# EAGLE board uradmonitor_D.101 (EAGLE 6.1)
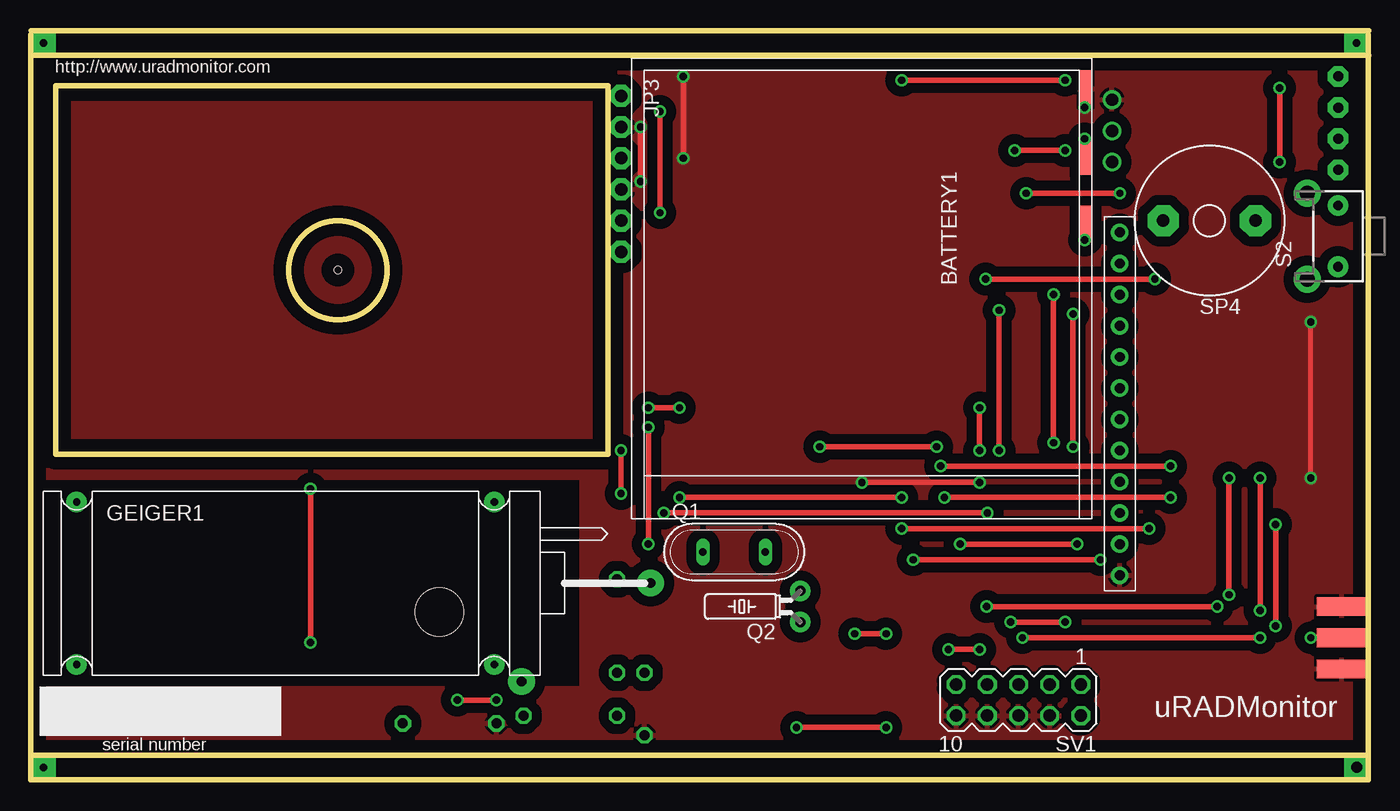
[diagram p0: board, top side]
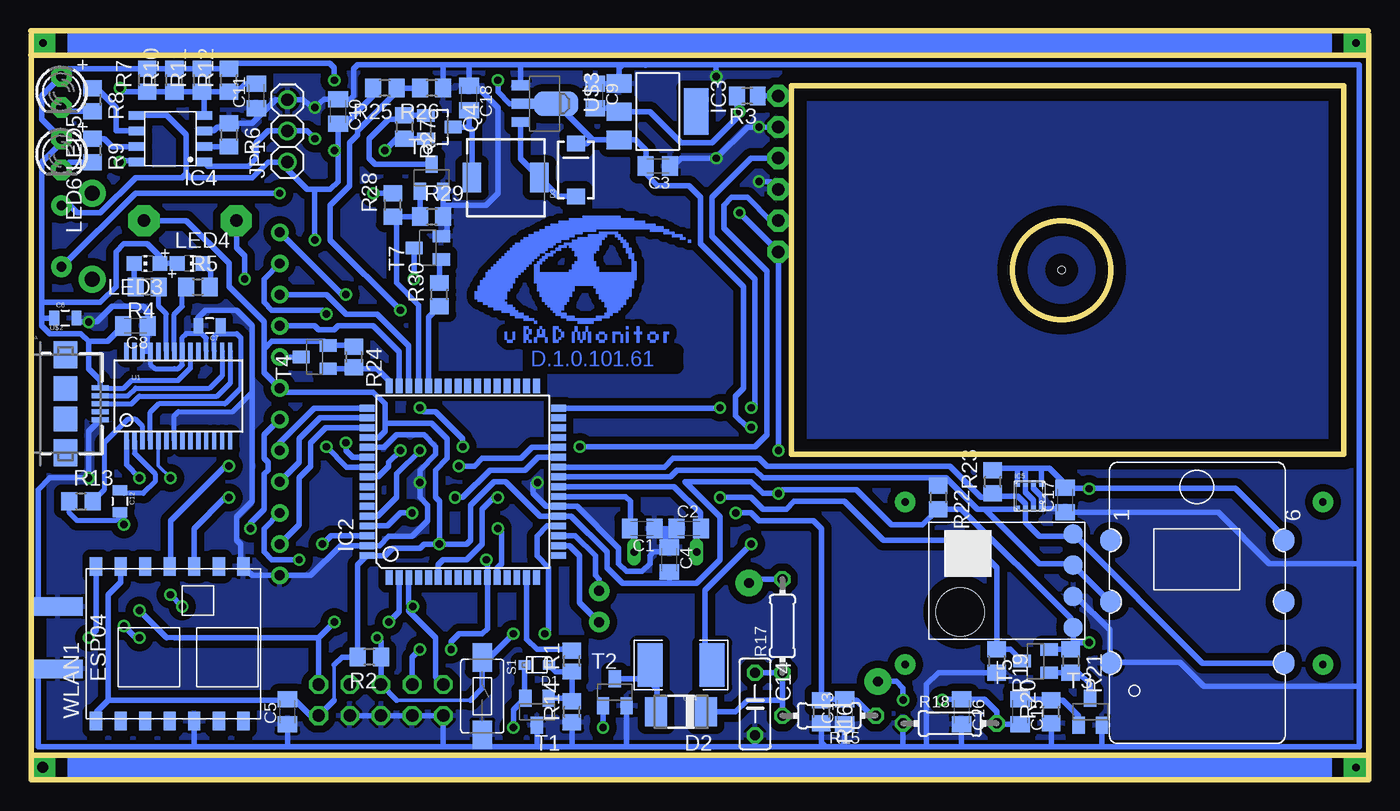
[diagram p1: board, bottom side, seen from below]

Size 109.03 x 61.03 mm. Coordinates in mm from the lower left corner, seen from the top.
Outline: 0,60.7 0,2
Outline: 0,2 0,0 109,0 109,2
Outline: 0,2 109,2
Outline: 0.03,61.03 109.03,61.03
Outline: 0.03,59.03 109.03,59.03
Outline: 109,2 109,60.7
Outline: 2.03,56.53 47.03,56.53 47.03,26.53 2.03,26.53 2.03,56.53
Outline: circle at 25.03,41.53 radius 4
Copper layers (1*16): Top 0.035mm / dielectric 1.5mm / Bottom 0.035mm
Design rules: minimum track width 10mil, minimum drill 24mil, track to track 8mil, track to pad 8mil, pad to pad 8mil, via to via 8mil, smd to smd 8mil, copper to edge 40mil, drill to drill 8mil, minimum pad ring 10mil, minimum via ring 8mil, stop-mask expansion 4mil, vias tented up to drill 0mil, thermal gap 10mil
Net classes: 1 power: width 0.254 mm
Holes 0.6 mm at 25.03,41.53
Milling: area 2,26.5 to 47,56.5

## Footprints (pad centres in the part's own frame; a part is rotated, then mirrored left to right if it is on the bottom)
BAT-CASIO-NP40 = smd 3 x 1: GND 34.59,-36.85; TEMP 29.09,-36.85; VCC 23.59,-36.85
C0805K = smd 1.3 x 1.6: 1 -1,0; 2 1,0
0805 = smd 0.8 x 1.2: 1 -0.9,0; 2 0.9,0
C050-025X075 = drill 0.813 octagon: 1 -2.54,0; 2 2.54,0
SOD-323F = smd 1 x 0.8: A -1,0; C 1,0
DO-214AC = smd 1.8 x 2.4: A 2.025,0; C -2.025,0
SMA-DIODE = smd 1.27 x 1.47: A -2.15,0; C 2.15,0
GEIGERTUBE_LND712 = drill 0.8 pad 2.184: ANODE 49.61,-7.57; CATHODE 39.11,-15.58
TQFP64 = smd 1.194 x 0.559: 1 -7.8,6; 2 -7.8,5.2; 3 -7.8,4.4; 4 -7.8,3.6; 5 -7.8,2.8; 6 -7.8,2; 7 -7.8,1.2; 8 -7.8,0.4; 9 -7.8,-0.4; 10 -7.8,-1.2; 11 -7.8,-2; 12 -7.8,-2.8; 13 -7.8,-3.6; 14 -7.8,-4.4; 15 -7.8,-5.2; 16 -7.8,-6; 33 7.8,-6; 34 7.8,-5.2; 35 7.8,-4.4; 36 7.8,-3.6; 37 7.8,-2.8; 38 7.8,-2; 39 7.8,-1.2; 40 7.8,-0.4; 41 7.8,0.4; 42 7.8,1.2; 43 7.8,2; 44 7.8,2.8; 45 7.8,3.6; 46 7.8,4.4; 47 7.8,5.2; 48 7.8,6 | smd 0.559 x 1.194: 17 -6,-7.8; 18 -5.2,-7.8; 19 -4.4,-7.8; 20 -3.6,-7.8; 21 -2.8,-7.8; 22 -2,-7.8; 23 -1.2,-7.8; 24 -0.4,-7.8; 25 0.4,-7.8; 26 1.2,-7.8; 27 2,-7.8; 28 2.8,-7.8; 29 3.6,-7.8; 30 4.4,-7.8; 31 5.2,-7.8; 32 6,-7.8; 49 6,7.8; 50 5.2,7.8; 51 4.4,7.8; 52 3.6,7.8; 53 2.8,7.8; 54 2,7.8; 55 1.2,7.8; 56 0.4,7.8; 57 -0.4,7.8; 58 -1.2,7.8; 59 -2,7.8; 60 -2.8,7.8; 61 -3.6,7.8; 62 -4.4,7.8; 63 -5.2,7.8; 64 -6,7.8
SOT223 = smd 1.499 x 2.007: 1 -2.261,-3.15; 2 0.025,-3.15; 3 2.311,-3.15 | smd 3.81 x 2.007: 4 0,3.15
TP4056 = smd 1.3 x 0.7: 1 -2.75,1.905; 2 -2.75,0.635; 3 -2.75,-0.635; 4 -2.75,-1.905; 5 2.75,-1.905; 6 2.75,-0.635; 7 2.75,0.635; 8 2.75,1.905
BME280 = smd 0.35 x 0.5: 1 0.975,-1.025; 2 0.325,-1.025; 3 -0.325,-1.025; 4 -0.975,-1.025; 5 -0.975,1.025; 6 -0.325,1.025; 7 0.325,1.025; 8 0.975,1.025
SMA-EDGE = smd 1.524 x 4.064: GND@0 0,0; GND@1 5.08,0; SIG 2.54,0 | smd 1.524 x 4.064 bottom: GND@2 0,0; GND@3 5.08,0
1X03 = drill 1.016: 1 -2.54,0; 2 0,0; 3 2.54,0
1X06-CLEANBIG = drill 1.016 pad 1.778 octagon: 1 -6.35,0; 2 -3.81,0; 3 -1.27,0; 4 1.27,0; 5 3.81,0; 6 6.35,0
CHIP-LED0805 = smd 1.2 x 1.2: A 0,-1.05; C 0,1.05
LED3MM = drill 0.813 pad 1.676 octagon: A -1.27,0; K 1.27,0
QS = drill 0.61 long: 1 -2.54,0; 2 2.54,0
TC26H = drill 0.813 pad 1.676: 1 -1.27,0; 2 1.27,0
SOT23 = smd 1 x 1.4: 1 -0.95,-1.1; 2 0.95,-1.1; 3 0,1.1
R0805 = smd 1.3 x 1.5: 1 -0.85,0; 2 0.85,0
R0805' = smd 1.3 x 1.5: 1 -0.95,0; 2 0.95,0
0204/7 = drill 0.813 octagon: 1 -3.81,0; 2 3.81,0
TACTILE-SWITCH-1101NE = smd 2.3 x 1.6: P$1 -3.15,0; P$2 3.15,0
TACTILE-PTH-SIDEEZ = drill 0.8 pad 1.7: 1 -2.5,0; 2 2.5,0 | drill 1.2 pad 2.2: ANCHOR1 -3.5,2.5; ANCHOR2 3.5,2.5
MICS_VZ_89T = smd 1.778 x 1.778: GND 16.349,-14.182; NC1 6.35,-14.183; NC2 11.356,-0.1; SCL 11.349,-14.183; SDA 16.351,-0.113; VCC 6.345,-0.105
SENSOR_GY68 = smd 1.524 x 1.524: GND 0.953,-3.493; SCL 0.953,-6.032; SDA 0.953,-8.572; VCC 0.953,-0.953 | hole 3.937: 10.16,-2.223
AL60P = drill 1.016 pad 2.54 octagon: 1 -3.759,0; 2 3.759,0
MA05-2 = drill 1.016 octagon: 1 -5.08,-1.27; 2 -5.08,1.27; 3 -2.54,-1.27; 4 -2.54,1.27; 5 0,-1.27; 6 0,1.27; 7 2.54,-1.27; 8 2.54,1.27; 9 5.08,-1.27; 10 5.08,1.27
SOT23-BEC = smd 1 x 1.4: B -0.95,-1.1; C 0,1.1; E 0.95,-1.1
SSOP28DB = smd 0.348 x 1.397: 1 -4.225,-3.656; 2 -3.575,-3.656; 3 -2.925,-3.656; 4 -2.275,-3.656; 5 -1.625,-3.656; 6 -0.975,-3.656; 7 -0.325,-3.656; 8 0.325,-3.656; 9 0.975,-3.656; 10 1.625,-3.656; 11 2.275,-3.656; 12 2.925,-3.656; 13 3.575,-3.656; 14 4.225,-3.656; 15 4.225,3.656; 16 3.575,3.656; 17 2.925,3.656; 18 2.275,3.656; 19 1.625,3.656; 20 0.975,3.656; 21 0.325,3.656; 22 -0.325,3.656; 23 -0.975,3.656; 24 -1.625,3.656; 25 -2.275,3.656; 26 -2.925,3.656; 27 -3.575,3.656; 28 -4.225,3.656
TJCTM24024-PCBCON = drill 0.8 pad 1.422: CS -20.32,0; D/C -22.86,0; GND -30.48,0; RESET -27.94,0; SCK -25.4,0; SDI -17.78,0; VCC -15.24,0; VCC_LED -12.7,0; XN_ADC -5.08,0; XP -10.16,0; YN -7.62,0; YP_ADC -2.54,0
USB-AB-MICRO-SMD = smd 1.4 x 0.4: D+ 2.85,0; D- 2.85,0.65; GND 2.85,-1.3; ID 2.85,-0.65; VBUS 2.85,1.3 | smd 1.9 x 2: P$6 0,1.25; P$7 0,-1.25 | smd 1.9 x 2.2: P$8 0,4; P$9 0,-4
SOT-89-3 = smd 0.8 x 1.4: 1 -1.499,-1.981; 3 1.499,-1.981 | smd 0.8 x 1.9: 2 0,-1.727 | smd 2.032 x 3.65: 2@1 0,0.94
INDUCTOR-1206 = smd 2.032 x 3.556: P$1 -2.54,0; P$2 2.54,0
B82462G = smd 2.4 x 1.5: P$1 0,2.75; P$2 0,-2.75
ESP8266_ESP04 = smd 1.5 x 1: ANT 7.4,4.8; CH_PD 7.4,2.8; GND 7.4,-7.2; GPIO0 -5.2,-7.2; GPIO2 -5.2,-5.2; GPIO12 -5.2,0.8; GPIO13 -5.2,-1.2; GPIO14 -5.2,2.8; GPIO15 -5.2,-3.2; GPIO16 7.4,0.8; NC 7.4,-5.2; URXD 7.4,-1.2; UTXD 7.4,-3.2; VCC -5.2,4.8

## Placement (x,y rotation side)
BATTERY1  BAT-CASIO-NP40BATTERY  [BAT-CASIO-NP40]  49.11,21.7 90 top
C1  33p  [C0805K]  59.22,20.48 180 bottom
C2  33p  [C0805K]  55.41,20.48 0 bottom
C3  10uF  [C0805K]  57.95,50.01 180 bottom
C4  100nF  [C0805K]  56.99,17.94 270 bottom
C5  100nF  [C0805K]  88.11,5.56 90 bottom
C6  0.1uF  [0805]  106.21,37.62 0 bottom
C7  0.1uF  [0805]  94.46,36.99 180 bottom
C8  10uF  [C0805K]  100.49,36.99 180 bottom
C9  100nF  [C0805K]  63.03,55.72 270 bottom
C10  10uF  [C0805K]  83.98,54.45 270 bottom
C11  10uF  [C0805K]  90.65,55.72 90 bottom
C12  0.1uF  [0805]  101.76,22.7 270 bottom
C13  15nF  [C0805K]  42.7,5.56 90 bottom
C14  10nF / 1KV  [C050-025X075]  50.01,6.19 270 bottom
C15  33p  [C0805K]  28.42,5.56 270 bottom
C16  68pF  [C0805K]  33.18,5.56 270 bottom
C17  100nF  [C0805K]  24.74,22.8 90 bottom
C18  10uF  [C0805K]  73.3,55.55 270 bottom
D1  1N4148  [SOD-323F]  67.79,9.37 180 bottom
D2  HER108  [DO-214AC]  56.04,5.56 180 bottom
D3  1N581-SMA  [SMA-DIODE]  64.61,49.69 90 bottom
GEIGER1  GEIGERTUBE_LND712  [GEIGERTUBE_LND712]  0.89,23.61 0 top
IC2  MEGA128-A  [TQFP64]  73.82,24.29 90 bottom
IC3  REG1117  [SOT223]  57.95,54.45 270 bottom
IC4  TP4056  [TP4056]  97.63,52.23 180 bottom
IC5  BME280  [BME280]  27.64,23.13 0 bottom
J$1  SMA_EDGE  [SMA-EDGE]  106.84,9.05 90 top
JP1  [1X03]  88.11,52.86 90 bottom
JP3  Dust Sensor  [1X06-CLEANBIG]  48.1,49.37 270 top
LED3  [CHIP-LED0805]  99.54,42.07 90 bottom
LED4  [CHIP-LED0805]  96.05,42.07 270 bottom
LED5  [LED3MM]  106.52,56.04 270 bottom
LED6  [LED3MM]  106.52,50.96 270 bottom
Q1  8Mhz  [QS]  57.31,18.58 0 top
Q2  [TC26H]  62.71,14.13 90 top
Q4  SI2305  [SOT23]  75.72,53.18 270 bottom
R1  100  [R0805]  64.93,9.69 90 bottom
R2  10K  [R0805']  81.44,10 180 bottom
R3  100  [R0805]  50.64,55.72 180 bottom
R4  1K  [R0805']  99.54,40.17 180 bottom
R5  1K  [R0805']  95.41,40.17 0 bottom
R6  1.2K  [R0805']  92.87,52.55 270 bottom
R7  1  [R0805']  99.54,56.99 90 bottom
R8  1K  [R0805']  103.98,55.41 270 bottom
R9  1K  [R0805']  103.98,51.28 270 bottom
R10  1  [R0805']  97.31,56.99 90 bottom
R11  1  [R0805']  95.09,56.99 90 bottom
R12  1  [R0805']  92.87,56.99 90 bottom
R13  100  [R0805']  104.94,22.7 0 bottom
R14  10K  [R0805]  64.93,5.56 90 bottom
R15  10M 1%  [0204/7]  43.97,5.24 180 bottom
R16  47K 1%  [R0805']  44.61,5.56 270 bottom
R17  10M  [0204/7]  47.78,12.54 90 bottom
R18  220K  [0204/7]  34.13,4.61 0 bottom
R19  10K  [R0805']  30.32,9.69 270 bottom
R20  100K  [R0805']  25.88,5.56 90 bottom
R21  10K  [R0805']  24.29,9.69 270 bottom
R22  4.7K  [R0805']  35.09,23.02 270 bottom
R23  4.7K  [R0805']  30.64,24.29 90 bottom
R24  100K  [R0805]  82.71,34.45 270 bottom
R25  220K  [R0805']  80.17,56.36 180 bottom
R26  220K  [R0805']  76.36,56.36 180 bottom
R27  100K  [R0805']  78.58,53.18 270 bottom
R28  10K  [R0805']  79.53,46.83 90 bottom
R29  10K  [R0805']  76.36,45.88 0 bottom
R30  100  [R0805']  75.72,39.53 90 bottom
S1  SWITCH-MOMENTARY-2-SMD-1101NE  [TACTILE-SWITCH-1101NE]  72.23,6.83 270 bottom
S2  SWITCH-MOMENTARY-2SIDE_EZ  [TACTILE-PTH-SIDEEZ]  106.52,44.29 90 top
SENSOR1  MICS_VZ_89T  [MICS_VZ_89T]  6.82,25.87 270 bottom
SENSOR2  SENSOR_GY68GY-86DIP  [SENSOR_GY68]  23.14,11.47 180 bottom
SP4  SPEAKER/AL60P  [AL60P]  96.05,45.56 180 top
SV1  isp  [MA05-2]  80.49,6.51 180 top
T1  MMBT2907  [SOT23-BEC]  67.79,5.56 180 bottom
T2  MPSA42  [SOT23-BEC]  61.44,7.14 0 bottom
T3  MMBT2222  [SOT23-BEC]  22.7,5.56 0 bottom
T4  2907  [SOT23-BEC]  85.89,34.45 90 bottom
T5  MMBT2907  [SOT23-BEC]  27.15,9.69 90 bottom
T6  MMBT2222  [SOT23-BEC]  76.36,49.06 0 bottom
T7  MMBT2222  [SOT23-BEC]  76.68,43.34 90 bottom
U1  FT232RLSSOP  [SSOP28DB]  97,31.27 0 bottom
U$1  TJCTM24024-PCBCON  [TJCTM24024-PCBCON]  88.74,47.15 90 top
U$2  USB_AB  [USB-AB-MICRO-SMD]  106.21,30.64 0 bottom
U$3  BL8530-SOT89-3  [SOT-89-3]  67.15,55.09 270 bottom
U$4  2.2mH  [INDUCTOR-1206]  56.04,9.37 180 bottom
U$5  [B82462G]  70.33,49.06 90 bottom
WLAN1  ESP8266_ESP04  [ESP8266_ESP04]  98.9,10 90 bottom

## Library data of the parts
BATTERY1 GEIGER1 IC4 IC5 Q4 SENSOR1 SENSOR2 U$1 WLAN1 = uradmonitor
C1-C5 C8-C11 C13-C18 R2 R4-R13 R15-R23 R25-R30 = rcl
C6 C7 C12 U1 = SparkFun
D1 JP1 JP3 LED3-LED6 SP4 = adafruit
D2 = diode
D3 U$3-U$5 = digital-toy
IC2 = atmel; MPN: ATMEGA128-16AU; OC_FARNELL: 9171118; OC_NEWARK: 95K7364
IC3 = burr-brown; MPN: REG1117; OC_FARNELL: 1097566; OC_NEWARK: 14P6981
J$1 U$2 = sparkfun-connectors
Q1 = special
Q2 = adafruit; OC_FARNELL: unknown; OC_NEWARK: unknown
R1 R3 R14 R24 = resistor
S1 S2 = sparkfun-electromechanical
SV1 = con-lstb; OC_FARNELL: unknown; OC_NEWARK: unknown
T1-T5 = transistor-neu-to92
T6 T7 = transistor

## Nets
3.3V [power]: C7.1 U1.4 U1.17
+5V_USB_VCC: C3.2 C6.1 C8.2 D3.C IC3.3 LED3.A LED4.A LED5.A LED6.A R7.2 R10.2 R11.2 R12.2 U1.20 U$2.VBUS U$3.2 U$4.P$1
GND: BATTERY1.GND C1.1 C2.1 C3.1 C4.1 C5.1 C6.2 C7.2 C8.1 C9.1 C10.1 C11.1 C13.1 C14.2 C16.2 C17.1 C18.1 IC2.22 IC2.53 IC2.63 IC3.1 IC4.3 IC5.1 IC5.7 J$1.GND@0 J$1.GND@1 J$1.GND@2 J$1.GND@3 JP1.3 JP3.2 JP3.4 R6.1 R14.1 R16.2 R18.1 R19.2 R20.1 R26.1 R29.2 S1.P$2 SENSOR1.GND SENSOR2.GND SV1.4 SV1.6 SV1.8 SV1.10 T1.C T2.E T3.E T6.E T7.E U1.7 U1.18 U1.21 U1.25 U1.26 U$1.GND U$2.GND U$3.1 WLAN1.GND WLAN1.GPIO15
MCU_RESET: C12.2 IC2.20 R2.1 R13.1 S1.P$1 SV1.5
MCU_RX0: IC2.2 SV1.1 U1.1
MCU_RX1: IC2.27 WLAN1.UTXD
MCU_SCL: IC2.25 IC5.4 R22.1 SENSOR1.SCL SENSOR2.SCL
MCU_SDA: IC2.26 IC5.3 R23.1 SENSOR1.SDA SENSOR2.SDA
MCU_TX0: IC2.3 SV1.9 U1.5
MCU_TX1: IC2.28 WLAN1.URXD
N$1: J$1.SIG WLAN1.ANT
N$2: LED3.C R4.2
N$3: IC2.56 R25.1 R26.2
N$4: IC2.15 R1.2
N$5: JP3.1 R3.1
N$6: IC2.11 SV1.7 U$1.SCK
N$7: LED4.C R5.2
N$8: D1.A R1.1 R14.2 T1.B
N$9: C1.2 IC2.23 Q1.2
N$11: C2.2 IC2.24 Q1.1
N$12: IC2.18 Q2.1
N$13: T4.C U$1.VCC_LED
N$14: IC2.12 U$1.SDI
N$15: U1.16 U$2.D-
N$16: U1.15 U$2.D+
N$17: D1.C T1.E T2.B
N$18: IC4.6 R8.1
N$19: GEIGER1.ANODE R17.2
N$20: C15.1 R20.2 T3.B
N$21: IC4.7 R9.1
N$22: LED6.K R9.2
N$23: IC2.32 JP3.3
N$24: LED5.K R8.2
N$25: BATTERY1.VCC C10.2 IC4.5 JP1.1 Q4.2 R25.2 R27.2 S2.2
N$26: C12.1 U1.2
N$27: IC4.2 R6.2
N$28: R13.2 U1.3
N$29: C11.2 IC4.4 IC4.8 R7.1 R10.1 R11.1 R12.1
N$30: IC2.19 Q2.2
N$31: BATTERY1.TEMP IC4.1 JP1.2
N$32: IC2.60 JP3.5
N$33: IC2.44 R30.1
N$35: D3.A U$3.3 U$5.P$2
N$36: IC2.51 U$1.RESET
N$38: IC2.50 U$1.D/C
N$39: IC2.49 U$1.CS
N$40: IC2.47 U$1.XP
N$41: IC2.46 U$1.YN
N$42: C15.2 C16.1 GEIGER1.CATHODE R18.2
N$43: IC2.54 U$1.YP_ADC
N$44: IC2.55 U$1.XN_ADC
N$45: IC2.48 R24.2 T4.B
N$46: Q4.1 R27.1 T6.C
N$47: C18.2 Q4.3 U$5.P$1
N$48: R28.2 S2.1
N$51: D2.A T2.C U$4.P$2
N$54: C13.2 IC2.61 R15.1 R16.1
N$56: C14.1 D2.C R15.2 R17.1
N$57: R30.2 T7.B
N$59: R21.2 T3.C T5.B
N$60: IC2.6 R19.1 T5.C
POWER_CONTROL: IC2.45 R28.1 R29.1 T6.B
RXLED: R5.1 U1.22
SOLDER_TUBE: SP4.2 T7.C
TXLED: R4.1 U1.23
VCC_3.3V: C4.2 C5.2 C9.2 C17.2 IC2.21 IC2.52 IC2.62 IC2.64 IC3.2 IC5.2 IC5.5 IC5.6 IC5.8 JP3.6 R2.2 R3.2 R21.1 R22.2 R23.2 R24.1 SENSOR1.VCC SENSOR2.VCC SP4.1 SV1.2 T4.E T5.E U$1.VCC WLAN1.CH_PD WLAN1.VCC

## Tracks (layer width: path | path; a pad name or v marks a point on that pad's centre or on a via)
3.3V
  Bottom 0.406: U1.17 94.07,36.11 93.82,36.36 93.5,36.36 | U1.4 99.27,29.95 98.59,30.64 93.19,30.64 91.92,31.91 91.92,36.04 92.23,36.36 93.5,36.36 | C7.1 93.56,36.41 93.5,36.36
+5V_USB_VCC  (via drill 0.6)
  Top 0.457: v70.96,56.99 v84.3,56.99 | v50.33,28.73 v50.33,19.21
  Bottom 0.406: 103.38,31.94 U$2.VBUS 103.33,31.91 101.44,31.91 100.81,32.55 97,32.55 96.02,33.52 U1.20
  Bottom 0.457: 106.21,57.62 LED5.A | LED5.A 108.11,55.72 108.11,53.82 LED6.A 106.52,51.91 108.11,50.33 108.11,38.9 | LED5.A 105.89,57.94 R7.2 R10.2 R11.2 R12.2 | U$2.VBUS 103.36,32.55 104.3,33.5 104.3,35.72 | 104.3,35.72 104.94,36.36 107.47,36.36 108.11,36.99 108.11,37.62 | C6.1 108.11,37.62 | v84.3,56.99 84.3,58 84.69,58.39 92.41,58.39 R12.2 | R12.2 92.88,57.92 | v70.96,56.99 70.96,56.04 70.01,55.09 U$3.2 66.2,55.09 63.34,52.23 | 63.34,52.23 63.25,52.14 IC3.3 59.76,52.14 58.9,51.28 58.9,50.06 C3.2 58.95,49.42 57.95,48.42 55.41,48.42 54.45,47.47 54.45,43.66 50.96,40.17 50.96,31.91 51.59,31.27 51.59,29.69 50.64,28.73 v50.33,28.73 | v50.33,19.21 54.09,15.45 54.09,9.96 U$4.P$1 | 108.11,38.9 108.11,37.62 | LED4.A LED3.A 98.49,42.61 99.54,43.66 101.44,43.66 102.08,43.02 102.08,40.17 103.35,38.9 108.11,38.9 | 104.3,35.72 102.76,35.72 C8.2 | D3.C 63.73,51.84 63.34,52.23
GND  (via drill 0.6)
  Top 0.406: v104.3,24.61 v104.3,37.31
  Top 0.457: v77.31,24.23 v67.73,24.23 | v49.69,48.74 v49.69,53.18 | 86.01,56.55 v85.89,54.77 | v53.18,50.64 v53.18,57.31
  Bottom 0.406: U1.26 U1.25 99.27,33.87 98.9,33.5 97.31,33.5 | 97.31,33.5 97,33.5 96.68,33.81 U1.21 96.67,36.05 96.36,36.36 95.41,36.36 | 97.32,33.49 97.31,33.5 | U1.7 97.32,29.68 97,30.01 92.55,30.01 90.97,31.59 | v104.3,24.61 104.62,24.61 | U1.18 94.72,35.98 95.09,36.36 95.41,36.36 | C7.2 95.36,36.41 95.41,36.36 | U$2.GND 103.38,29.34 103.67,29.05
  Bottom 0.457: SV1.4 SV1.6 SV1.8 SV1.10 75.41,2.7 | 57.31,20.48 C1.1 | 92.23,53.18 92.55,53.5 | R6.1 92.56,53.5 93.19,53.5 93.5,53.18 93.82,53.18 94.14,52.86 IC4.3 | 92.55,53.5 R6.1 | IC5.7 27.32,23.77 26.68,23.13 IC5.1 25.04,22.1 C17.1 12.28,21.8 8.1,17.62 0.8,17.62 | SENSOR1.GND 21.14,9.52 | 21.19,9.64 SENSOR1.GND | 21.13,9.58 15.38,9.58 13.45,7.64 0.98,7.64 0.8,7.46 | 21.19,9.58 21.13,9.58 | 21.13,9.58 SENSOR1.GND | 0.8,7.46 0.8,2.7 22.38,2.7 | 0.8,7.46 0.8,17.62 | 0.8,17.62 0.8,58.26 53.18,58.26 | 53.18,58.26 58.9,58.26 | 58.9,58.26 60.8,58.26 | 60.8,58.26 69.06,58.26 | 69.06,58.26 73.19,58.26 | 73.19,58.26 75.09,58.26 | 22.38,2.7 25.88,2.7 | 25.88,2.7 33.18,2.7 | 33.18,2.7 36.04,2.7 | 36.04,2.7 37.94,2.7 | 37.94,2.7 43.02,2.7 | 43.02,2.7 44.29,2.7 | 44.29,2.7 50.01,2.7 | 50.01,2.7 60.48,2.7 | 60.48,2.7 64.93,2.7 | 64.93,2.7 67.79,2.7 | 67.79,2.7 72.23,2.7 | 72.23,2.7 75.41,2.7 | 75.41,2.7 88.11,2.7 | 88.11,2.7 95.73,2.7 | 95.73,2.7 108.43,2.7 108.43,9.05 J$1.GND@0 | 92.55,53.5 R6.1 | SENSOR2.GND 23.85,14.96 21.12,12.23 21.12,9.57 SENSOR1.GND | T3.E 21.75,2.7 22.38,2.7 | R20.1 25.88,2.7 | C16.2 33.18,2.7 | R18.1 37.94,2.7 | R19.2 35.08,8.73 36.04,7.78 36.04,2.7 | T1.C 67.79,2.7 | R14.1 64.93,2.7 | T2.E 60.49,2.7 60.48,2.7 | C2.1 57.31,20.48 | 57.31,20.48 57.31,19.26 C4.1 57.36,18.58 58.26,18.58 58.58,18.26 58.58,17.62 59.22,16.99 60.48,16.99 61.12,17.62 61.12,18.89 64.52,22.29 IC2.22 67.06,22.29 68.11,23.34 68.11,24.18 v67.73,24.23 | C14.2 50.01,2.7 | R16.2 44.61,3.02 44.29,2.7 | C13.1 42.7,3.02 43.02,2.7 | S1.P$2 72.23,2.7 | 92.55,53.5 90.97,53.5 90.01,54.45 | WLAN1.GPIO15 95.7,2.73 95.73,2.7 | J$1.GND@1 108.43,14.13 108.43,23.66 107.47,24.61 104.62,24.61
  Bottom 0.457: C11.1 90.33,54.77 90.01,54.45 | C7.2 95.41,37.04 95.41,37.62 94.78,38.26 92.23,38.26 90.97,36.99 90.97,31.59 90.97,22.7 92.23,21.43 92.23,19.53 91.92,19.21 91.92,17.62 WLAN1.GND | v104.3,24.61 104.3,28.42 103.67,29.05 | U1.25 99.54,35.2 99.54,36.94 C8.1 99.49,38.21 99.86,38.58 102.39,38.58 103.67,37.31 v104.3,37.31 104.99,37.31 C6.2 | C6.2 105.31,37.89 | 105.25,37.94 105.25,37.68 C6.2 | WLAN1.GND 91.6,17.51 | WLAN1.GND 90.97,16.67 U$1.GND 86.2,16.67 83.78,19.09 IC2.63 80.61,19.09 79.85,19.84 77.95,19.84 76.68,21.12 76.68,22.38 77.31,23.02 v77.31,24.23 77.31,25.24 76.04,26.51 76.04,27.15 77,28.1 79.22,28.1 80.23,27.09 IC2.53 | JP3.4 48.74,48.74 v49.69,48.74 | JP3.2 v49.69,53.18 50.64,53.18 v53.18,50.64 56.04,50.64 56.67,50.01 C3.1 | C5.1 88.11,2.7 | R26.1 75.41,58.27 75.09,58.26 | 90.01,54.45 89.06,55.41 JP1.3 86.84,55.41 85.96,54.7 | v85.89,54.77 85.96,54.7 | 60.8,58.26 61.09,57.97 IC3.1 63.02,56.71 C9.1 | 75.09,58.26 82.39,58.26 82.71,57.95 82.71,55.72 82.98,55.45 C10.1 | C10.1 85.12,55.45 85.96,54.7 | 83.98,55.41 C10.1 | 73.19,58.26 73.3,58.14 C18.1 73.19,56.67 72.87,56.36 72.55,56.36 70.96,54.77 70.96,47.78 71.92,46.83 75.41,46.83 75.41,47.15 T6.E R29.2 75.09,45.56 75.09,44.78 T7.E | U$3.1 69.13,58.19 69.06,58.26 | 58.95,58.22 58.9,58.26 | v53.18,57.31 53.18,58.26
  pour Bottom (isolate 0.61): 0.16,61.12 0.16,0.16 108.75,0.16 108.75,61.12
  pour Top (isolate 0.813): 0.16,7.46 44.93,7.46 44.93,24.61 0.16,24.61 0.16,60.8 108.75,60.8 108.75,0.48 0.16,0.48
MCU_RESET  (via drill 0.6)
  Top 0.457: v67.15,11.91 v69.69,11.91 | v80.81,11.59 v100.17,11.59 | v101.44,12.54 v101.44,20.8
  Bottom 0.305: 73.19,6.51 79.22,6.51
  Bottom 0.406: C12.2 101.71,21.8 101.44,21.75 102.08,21.12 105.25,21.12 105.89,21.75 R13.1
  Bottom 0.457: IC2.20 66.94,20.69 67.79,19.84 67.79,18.26 66.84,17.3 66.84,12.23 v67.15,11.91 | 72.21,10 S1.P$1 | S1.P$1 72.23,7.46 73.19,6.51 | 79.22,6.51 SV1.5 R2.1 80.49,11.27 v80.81,11.59 | v69.69,11.91 71.6,10 72.23,10 S1.P$1 | v100.17,11.59 100.49,11.59 v101.44,12.54 | v101.44,20.8 101.44,21.75
MCU_RX0  (via drill 0.6)
  Top 0.457: v79.85,12.86 v84.3,12.86 | v100.17,13.81 v100.17,24.61
  Bottom 0.406: 97.31,11.59 97.95,11.59
  Bottom 0.457: IC2.2 79.02,13.69 v79.85,12.86 | v84.3,12.86 85.57,11.59 | 85.57,11.59 SV1.1 | U1.1 101.22,25.66 v100.17,24.61 | 85.57,11.59 97.31,11.59 | 97.95,11.59 v100.17,13.81
MCU_RX1  (via drill 0.6)
  Top 0.457: v74.45,23.02 v92.87,23.02
  Bottom 0.457: IC2.27 67.69,26.29 68.74,25.24 71.6,25.24 73.82,23.02 v74.45,23.02 | v92.87,23.02 93.19,23.02 95.73,20.48 95.73,17.43 WLAN1.UTXD
MCU_SCL
  Bottom 0.457: 35.4,24.61 34.45,24.61 31.91,22.07 31.27,22.07 | R22.1 35.09,24.29 35.4,24.61 | SENSOR1.SCL 21.11,14.52 SENSOR2.SCL 24.21,17.62 26.83,17.62 31.27,22.07 | 31.27,22.07 28.65,22.07 IC5.4 | 35.4,24.61 49.37,24.61 50.01,25.24 56.36,25.24 56.91,24.69 IC2.25
MCU_SDA
  Bottom 0.457: 30.85,23.13 R23.1 | R23.1 30.43,23.13 28.61,23.13 27.97,22.48 IC5.3 27.97,20.98 26.83,19.84 24.29,19.84 SENSOR2.SDA 13.57,9.52 SENSOR1.SDA | R23.1 30.96,23.02 31.59,23.02 34.13,25.56 49.06,25.56 49.69,26.2 56.67,26.2 57.38,25.49 IC2.26
MCU_TX0  (via drill 0.6)
  Top 0.457: v97.63,24.61 v97.63,15.08 | v96.68,14.13 v77.9,14.13
  Bottom 0.305: U1.5 98.62,25.6 v97.63,24.61
  Bottom 0.457: SV1.9 76.04,8.41 76.04,11.59 78.22,13.77 78.22,13.81 v77.9,14.13 77.95,14.13 78.22,14.4 IC2.3 | v97.63,15.08 v96.68,14.13
MCU_TX1  (via drill 0.6)
  Top 0.457: v74.14,25.56 v92.87,25.56
  Bottom 0.457: IC2.28 68.16,27.09 69.06,26.2 72.23,26.2 72.87,25.56 v74.14,25.56 | v92.87,25.56 93.19,25.56 97.63,21.12 97.63,17.47 WLAN1.URXD
N$1  (via drill 0.6)
  Top 0.457: v104.3,11.59 J$1.SIG
  Bottom 0.457: WLAN1.ANT 103.7,12.19 v104.3,11.59
N$2
  Bottom 0.457: LED3.C 100.59,40.27 R4.2
N$3  (via drill 0.6)
  Top 0.457: v78.9,38.26 v78.9,26.83
  Bottom 0.457: R26.2 R25.1 | R25.1 | v78.9,38.26 84.61,43.97 84.61,46.83 83.03,48.42 83.03,51.91 82.39,52.55 82.39,52.86 79.53,55.72 79.53,56.04 R25.1 | IC2.56 80.72,24.69 79.85,25.56 79.85,25.88 v78.9,26.83
N$4
  Bottom 0.457: 65.25,10.64 64.93,10.32 R1.2 | R1.2 64.93,10.64 | IC2.15 68.62,11.47 67.79,10.64 65.03,10.64 R1.2
N$5
  Bottom 0.457: JP3.1 49.69,55.72 R3.1 50.01,55.72
N$6  (via drill 0.6)
  Top 0.457: v74.77,10.64 v77.31,10.64 | v87.16,17.94 v71.92,17.94
  Bottom 0.457: v77.31,10.64 77.95,10 SV1.7 | v71.92,17.94 71.82,17.84 IC2.11 71.82,12.32 72.23,11.91 74.14,11.91 74.77,11.27 v74.77,10.64 | v87.16,17.94 89.38,17.94 90.01,18.58 90.01,20.48 U$1.SCK
N$7
  Bottom 0.457: R5.2 94.36,40.27 94.36,41.44 LED4.C
N$8
  Bottom 0.457: T1.B 65.18,6.66 R14.2 R1.1 66.25,8.84 D1.A
N$9
  Bottom 0.457: Q1.2 59.85,20.12 C1.2 60.17,20.53 60.17,22.7 60.56,23.09 IC2.23
N$10  (via drill 0.6 pad 1.68)
  other vias: 37.76,22.64
N$11
  Bottom 0.457: Q1.1 54.77,20.12 C2.2 | IC2.24 56.59,23.89 54.45,21.75 54.45,20.48 C2.2 | 54.45,20.53 C2.2
N$12
  Bottom 0.457: IC2.18 65.13,19.09 64.3,18.26 64.3,14.45 Q2.1
N$13
  Bottom 0.457: T4.C U$1.VCC_LED
N$14  (via drill 0.6)
  Top 0.457: v70.96,20.48 v91.12,20.48
  Bottom 0.457: IC2.12 71.02,17.25 70.64,17.62 70.64,20.16 v70.96,20.48 | U$1.SDI 90.01,28.1 90.01,26.2 89.7,25.88 89.7,25.24 90.01,24.93 90.01,22.07 91.12,20.96 v91.12,20.48
N$15
  Bottom 0.406: U1.16 93.42,32.95 94.46,31.91 100.49,31.91 101.11,31.29 U$2.D-
N$16
  Bottom 0.406: U1.15 92.77,32.33 93.82,31.27 100.17,31.27 100.81,30.64 U$2.D+
N$17  (via drill 0.6)
  Top 0.457: v62.39,4.29 v69.69,4.29
  Bottom 0.457: T1.E 68.79,6.71 D1.C | T1.E 68.74,6.51 | v69.69,4.29 69.69,5.7 T1.E | T2.B v62.39,4.29
N$18
  Bottom 0.457: IC4.6 102.08,52.86 102.08,54.77 103.35,56.04 103.98,56.04 R8.1
N$19
  Bottom 0.457: R17.2 50.19,16.35 GEIGER1.ANODE
N$20
  Bottom 0.457: T3.B 23.65,5.24 24.92,6.51 R20.2 | 26.51,6.51 R20.2 | C15.1 26.56,6.56 R20.2
N$21
  Bottom 0.457: IC4.7 102.39,51.59 103.03,52.23 R9.1
N$22
  Bottom 0.457: LED6.K 105.89,50.33 R9.2
N$23  (via drill 0.6)
  Top 0.457: v52.86,30.32 v50.33,30.32
  Bottom 0.457: JP3.3 50.33,50.64 53.5,47.47 53.5,44.29 50.01,40.8 50.01,30.32 v50.33,30.32 | IC2.32 52.9,30.29 v52.86,30.32
N$24
  Bottom 0.457: R8.2 106.21,54.45 LED5.K
N$25  (via drill 0.6)
  Top 0.457: v85.89,43.97 BATTERY1.VCC | v80.17,51.28 v84.3,51.28
  Bottom 0.457: IC4.5 97.95,54.14 96.36,52.55 96.36,49.37 | 85.89,48.1 84.61,48.1 83.98,48.74 83.98,51.28 | v84.3,51.28 83.98,51.28 | 83.98,51.28 C10.2 83.93,53.5 83.34,53.5 81.12,55.72 R25.2 | 85.89,48.1 86.52,48.1 88.11,49.69 JP1.1 89.7,50.33 90.97,49.06 96.05,49.06 96.36,49.37 | 85.89,48.1 v85.89,43.97 | Q4.2 R27.2 79.22,52.23 v80.17,51.28 | S2.2 105.85,46.79 105.25,46.2 103.35,46.2 100.49,49.06 96.68,49.06 96.36,49.37
N$26
  Bottom 0.406: U1.2 100.57,26.59 98.9,24.93 98.9,24.29 99.86,23.34 101.44,23.34 101.76,23.66 C12.1
N$27
  Bottom 0.457: R6.2 IC4.2
N$28
  Bottom 0.406: R13.2 103.03,23.66 103.03,27.47 101.12,29.37 100.49,29.37 99.92,28.8 U1.3
  Bottom 0.457: R13.2
N$29  (via drill 0.6)
  Top 0.457: v101.76,56.36 v101.76,50.33
  Bottom 0.457: R11.1 R12.1 92.23,56.04 91.55,56.72 C11.2 | R11.1 95.73,56.04 R10.1 R7.1 101.44,56.04 v101.76,56.36 | IC4.8 100.38,50.43 101.65,50.43 v101.76,50.33 | IC4.4 94.88,55.83 R11.1
N$30
  Bottom 0.457: Q2.2 62.71,16.35 63.03,16.67 63.03,18.26 64.66,19.89 IC2.19
N$31  (via drill 0.6)
  Top 0.406: 85.89,50.96 85.89,50.64 85.96,50.72 BATTERY1.TEMP
  Top 0.457: v85.89,52.23 85.89,50.96
  Bottom 0.457: IC4.1 94.56,50.01 91.28,50.01 90.65,50.64 90.65,51.91 89.7,52.86 JP1.2 86.52,52.86 v85.89,52.23
N$32  (via drill 0.6)
  Top 0.457: v64.3,27.15 v73.82,27.15 | v77.31,30.32 v77.31,26.83
  Bottom 0.457: JP3.5 48.74,45.56 50.64,47.47 51.91,47.47 52.55,46.83 52.55,44.93 49.06,41.44 49.06,28.1 50.01,27.15 v64.3,27.15 | v73.82,27.15 73.82,27.78 76.04,30.01 77,30.01 v77.31,30.32 | IC2.60 80.75,21.49 79.22,23.02 79.22,24.93 v77.31,26.83
N$33
  Bottom 0.457: IC2.44 76.62,37.68 R30.1
N$34  (via drill 0.6 pad 2)
  other vias: 1.03,1.03
N$35
  Bottom 0.457: U$3.3 69.13,50.61 U$5.P$2 66.06,47.54 D3.A
N$36
  Bottom 0.457: IC2.51 84.98,28.69 86.2,27.47 86.2,25.56 87.16,24.61 87.16,20.8 U$1.RESET
N$37  (via drill 0.6 pad 1.68)
  other vias: 37.76,9.42
N$38
  Bottom 0.457: IC2.50 85.45,29.49 87.16,27.78 87.16,25.88 U$1.D/C
N$39
  Bottom 0.457: IC2.49 85.92,30.29 88.74,27.47 U$1.CS
N$40
  Bottom 0.457: IC2.47 79.02,34.89 81.12,36.99 83.98,36.99 84.3,36.67 85.57,36.67 85.89,36.99 U$1.XP
N$41
  Bottom 0.457: IC2.46 78.22,35.36 80.81,37.94 83.34,37.94 84.93,39.53 U$1.YN
N$42  (via drill 0.6)
  Top 0.457: v34.77,6.51 v37.94,6.51
  Bottom 0.457: C15.2 30.91,4.56 R18.2 30.32,5.56 31.32,6.56 C16.1 34.72,6.56 v34.77,6.51 | GEIGER1.CATHODE 38.51,8.03 37.94,7.46 v37.94,6.51
N$43  (via drill 0.6)
  Top 0.457: v83.34,27.47 v83.34,39.53
  Bottom 0.457: IC2.54 82.81,26.29 83.34,26.83 v83.34,27.47 | v83.34,39.53 83.66,39.53 U$1.YP_ADC
N$44  (via drill 0.6)
  Top 0.457: v84.93,27.15 v84.93,37.94
  Bottom 0.457: IC2.55 83.28,25.49 v84.93,27.15 | v84.93,37.94 85.25,38.26 89.38,38.26 90.01,38.9 90.01,40.8 U$1.XN_ADC
N$45
  Bottom 0.457: T4.B 82.71,33.5 R24.2 82.61,33.5 80.81,33.5 79.82,32.51 IC2.48
N$46
  Bottom 0.457: Q4.1 76.99,54.13 77,54.14 77.31,54.13 R27.1 78.9,54.14 79.22,53.82 79.85,53.82 81.44,52.23 81.44,50.64 80.95,50.16 T6.C
N$47
  Bottom 0.457: C18.2 73.3,53.18 | Q4.3 73.3,53.18 | U$5.P$1 73.08,52.96 73.3,53.18
N$48  (via drill 0.6)
  Top 0.457: v88.74,47.78 v81.12,47.78
  Bottom 0.457: S2.1 106.48,41.79 100.49,47.78 v88.74,47.78 | v81.12,47.78 79.22,47.78 R28.2
N$49  (via drill 0.6 pad 2)
  other vias: 108.03,60.03
N$50  (via drill 0.6 pad 1.68)
  other vias: 3.75,22.64
N$51
  Bottom 0.457: D2.A 57.99,5.63 57.99,7.44 58.8,8.25 | T2.C 58.8,8.25 | U$4.P$2 58.58,8.46 58.8,8.25
N$52  (via drill 0.6 pad 1.68)
  other vias: 3.75,9.42
N$53  (via drill 0.6 pad 2)
  other vias: 1.03,60.03
N$54  (via drill 0.6)
  Top 0.457: v51.59,21.75 v77.95,21.75
  Bottom 0.457: R15.1 40.48,5.24 41.75,6.51 42.66,6.51 C13.2 44.56,6.56 R16.1 44.61,20.48 45.25,21.12 49.69,21.12 50.33,21.75 v51.59,21.75 | IC2.61 79.96,20.69 78.9,21.75 v77.95,21.75
N$56
  Bottom 0.457: R15.2 47.78,6.51 | 47.78,6.51 R17.1 C14.1 | D2.C 51.59,5.56 50.64,6.51 47.78,6.51
N$57
  Bottom 0.457: R30.2 75.72,42.24 T7.B
N$59
  Bottom 0.457: T5.B R21.2 23.66,8.73 22.7,7.78 T3.C
N$60  (via drill 0.6)
  Top 0.457: v52.86,23.02 v70.96,23.02
  Bottom 0.457: T5.C 29.2,10.63 R19.1 30.32,17.3 32.55,19.53 39.53,19.53 42.7,22.7 46.83,22.7 47.47,22.07 49.37,22.07 50.33,23.02 v52.86,23.02 | v70.96,23.02 71.28,23.02 72.23,22.07 72.23,19.21 73.5,17.94 75.41,17.94 75.82,17.53 IC2.6
N$70  (via drill 0.9 pad 2)
  other vias: 108.03,1.03
POWER_CONTROL
  Bottom 0.457: T6.B R29.1 R28.1 79.22,45.56 79.22,40.48 77.42,38.69 IC2.45
RXLED
  Bottom 0.406: U1.22 97.32,37.94 96.68,38.58 96.68,39.85 R5.1
SOLDER_TUBE  (via drill 0.6)
  Top 0.457: v91.6,40.8 v77.8,40.8
  Bottom 0.457: v91.6,40.8 91.6,42.7 92.23,43.34 92.23,45.51 SP4.2 | T7.C 77.78,40.82 v77.8,40.8
TXLED
  Bottom 0.406: U1.23 97.97,37.97 98.59,38.58 R4.1
VCC_3.3V  (via drill 0.6)
  Top 0.457: v22.8,11.19 v22.8,23.73 | v85.25,19.21 v75.72,19.21 | v51.28,54.45 v51.28,46.2 | v48.1,26.83 v48.1,23.34
  Bottom 0.305: 84.3,6.51 84.3,9.37
  Bottom 0.457: SENSOR1.VCC 6.87,19.78 10.87,23.77 22.8,23.77 | 22.8,23.77 24.71,23.77 C17.2 24.74,24.09 26.03,25.38 26.68,25.38 | 27.97,25.38 28.61,25.38 28.62,25.38 | 27.97,25.38 26.68,25.38 | IC5.8 26.67,25.38 26.68,25.38 | IC5.5 28.62,25.38 | 27.97,25.38 IC5.6 27.97,23.45 27.32,22.8 IC5.2 | v22.8,23.73 22.8,23.77 | 28.62,25.38 30.5,25.38 R23.2 | T5.E R21.1 24.09,10.84 24.09,11.27 | 24.09,11.27 SENSOR2.VCC 24.29,12.62 24.29,13.18 33.18,22.07 R22.2 36.36,20.8 38.9,20.8 41.75,23.66 47.78,23.66 v48.1,23.34 49.37,23.34 50.33,24.29 55.72,24.29 52.86,21.43 52.86,17.94 54.77,16.04 56.99,16.04 | v22.8,11.19 24,11.19 24.09,11.27 | 56.99,16.04 60.8,16.04 62.07,17.3 62.07,18.58 64.99,21.49 IC2.21 67.53,21.49 70.33,24.29 71.28,24.29 73.19,22.38 73.19,19.53 73.5,19.21 v75.72,19.21 | C4.2 56.99,16.04 | 84.3,6.51 SV1.2 86.2,5.24 87.47,6.51 88.06,6.51 C5.2 88.16,6.51 102.71,6.51 | 84.3,9.37 83.66,10 R2.2 82.39,17.52 IC2.64 81.59,18.26 80.17,18.26 79.53,18.89 77.31,18.89 77,19.21 v75.72,19.21 | R24.1 82.71,35.4 T4.E 85.11,35.72 89.38,35.72 90.01,35.09 | 90.01,35.09 90.01,33.18 U$1.VCC 88.42,31.59 81.12,31.59 80.17,30.64 80.17,29.05 | WLAN1.VCC 103.67,4.84 103.67,5.56 102.71,6.51 | v48.1,26.83 JP3.6 v51.28,46.2 | R3.2 51.49,54.67 v51.28,54.45 51.28,54.14 53.5,51.91 56.04,51.91 58.56,54.43 IC3.2 61.39,54.72 C9.2 | IC2.52 80.7,27.89 80.17,28.42 80.17,29.05 | IC2.62 84.57,19.89 v85.25,19.21 | 80.17,29.05 76.36,29.05 75.09,27.78 75.09,26.2 76.04,25.24 76.04,23.02 75.72,22.7 v75.72,19.21 | WLAN1.CH_PD 101.7,16.09 102.71,15.08 102.71,6.51 | 90.01,35.09 90.01,37.31 92.87,40.17 92.87,42.07 96.36,45.56 SP4.1
(copper drawn outside any net)
  shapes: Bottom area x206

## Text on the board
Bottom: D.1.0.101.61
tPlace: http://www.uradmonitor.com | uRADMonitor | serial number